# Altium PCB sadwinner.PcbDoc
Units mil, origin at the board's own origin, x right, y up, seen from the top; angles counter-clockwise.
Board outline 3706.25 x 1719.66 mil, 2 copper layers (Top Layer, Bottom Layer); 75 components, 54 nets, 287 pads, 5 vias.
Unrouted connection lines stored in the file: 158.
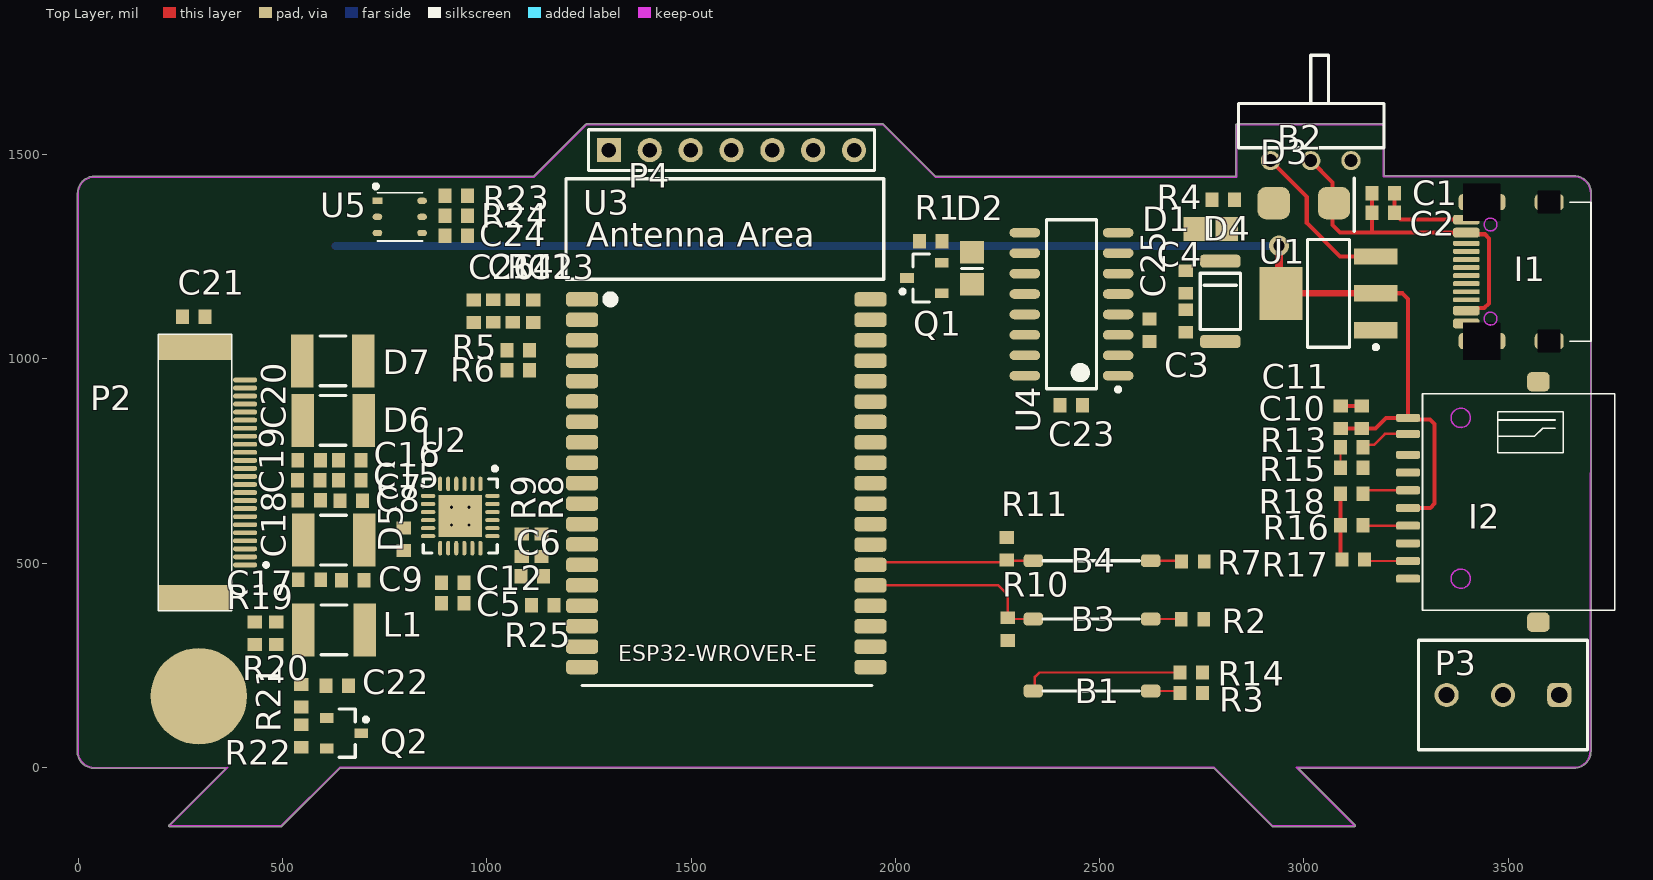
[diagram p0: Top Layer view]
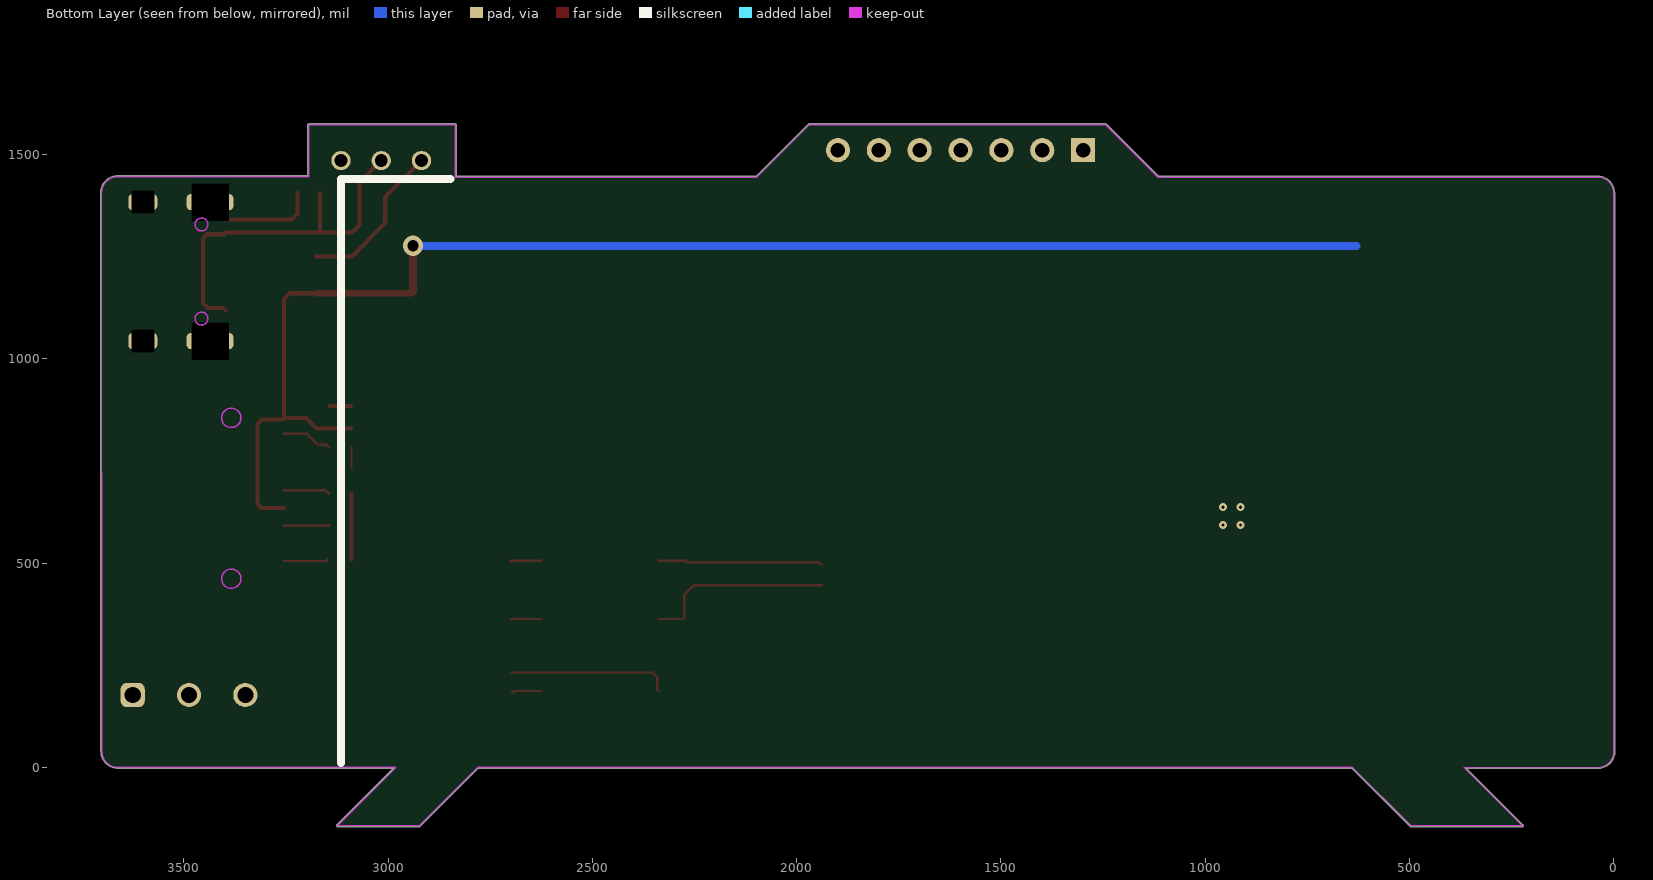
[diagram p1: Bottom Layer view, seen from below]

## Layer stack, top to bottom
Top Solder: solder mask 0.4, Solder Resist, Dk 3.5
Top Layer: signal copper 1.4
Dielectric 1: dielectric 12.6, FR-4, Dk 4.8
Bottom Layer: signal copper 1.4
Bottom Solder: solder mask 0.4, Solder Resist, Dk 3.5

## Board outline
-1.96,32.67 ccw(c39.37,39.37) 39.37,-2.5 360.84,-2.5 221.88,-141.45 ccw(c223.28,-142.86) 223.28,-144.84 496.91,-144.84 ccw(c496.91,-142.86) 498.32,-144.25 640.59,-1.98 2779.69,-1.98 2921.83,-144.12 ccw(c2923.22,-142.74) 2923.23,-144.7 3124.02,-144.7 ccw(c3124.02,-142.72) 3126,-142.72 ccw(c3124.02,-142.72) 3125.41,-141.3 2986.09,-1.98 3661.42,-1.98 ccw(c3661.42,39.37) 3702.77,39.37 3703.76,1405.51 ccw(c3661.42,1405.51) 3661.42,1447.85 3307.09,1447.85 ccw(c3306.59,1443.94) 3306.1,1447.85 3196.87,1447.85 3196.87,1571.85 ccw(c3194.88,1571.85) 3195.7,1573.66 ccw(c3193.9,1572.83) 3193.9,1574.82 2835.63,1574.82 ccw(c2835.63,1572.83) 2833.65,1572.83 2833.65,1446.87 2098.26,1446.87 1970.89,1574.24 ccw(c1969.5,1572.85) 1969.49,1574.82 1243.11,1574.82 ccw(c1243.11,1572.83) 1241.7,1574.23 1114.2,1446.73 1046.16,1446.73 ccw(c1045.6,1444.83) 1045.6,1446.81 38.14,1446.81 ccw(c39.4,1405.48) -1.94,1405.9 -1.98,40.7 ccw(c-0.51,39.37) -2.5,39.37 ccw(c39.37,39.37)

## Design rules (kind name [scope] priority, off if disabled: settings)
Clearance [All] p1: gap=3.94 ignorepadtopadclearanceinfootprint=FALSE
PolygonConnect [All] p1: connectstyle=Relief reliefconductorwidth=10 reliefentries=4 polygonreliefangle="90 Angle" airgapwidth=10
RoutingCorners [All] p1: cornerstyle=45-Degree minsetback=50 maxsetback=50
RoutingVias [All] p1: holewidth=11.81 width=11.81 viastyle="Through Hole" minholewidth=7.87 minwidth=15.75 maxholewidth=27.56 maxwidth=31.5
SolderMaskExpansion [All] p1: expansion=4 istentingtop=FALSE
Width Width_1 [All] p1: maxlimit=50 minlimit=6 preferedwidth=6
Width Width_power [InNet('3V3')] p2: maxlimit=19.68 minlimit=7.87 preferedwidth=11.81
29 further rules are at their usual default settings.

## Components (designator, comment, footprint, x,y, rotation, side; value= is the part's Value field where it differs from the comment)
B1 "button" BUTTON-BODY(3x6x2.5) 2361.22,187.01 r0 top
B2 "SWITCH" switch-3 2918.31,1485.24 r0 top
B3 "button" BUTTON-BODY(3x6x2.5) 2361.22,363.19 r0 top
B4 "button" BUTTON-BODY(3x6x2.5) 2361.22,505.91 r0 top
C1 "Cap Semi" 1608[0603] 3193.9,1405.51 r180 top value=100pF
C2 "Cap Semi" 1608[0603] 3193.9,1357.28 r180 top value=100pF
C3 "Cap Semi" 1608[0603] 2710.63,1092.52 r270 top value=100pF
C4 "Cap Semi" 1608[0603] 2710.63,1187.99 r90 top value=100pF
C5 "Cap Semi" 1608[0603] 916.34,401.57 r0 top value=100pF
C6 "Cap Semi" 1608[0603] 1111.22,467.52 r180 top value=100pF
C7 "Cap Semi" 1608[0603] 668.31,652.56 r180 top value=100pF
C8 "Cap Semi" 1608[0603] 797.24,558.07 r90 top value=100pF
C9 "Cap Semi" 1608[0603] 672.24,457.68 r180 top value=100pF
C10 "Cap Semi" 1608[0603] 3090.55,857.28 r270 top value=100pF
C11 "Cap Semi" 1608[0603] 3141.73,857.28 r270 top value=100pF
C12 "Cap Semi" 1608[0603] 916.34,451.77 r180 top value=100pF
C13 "Cap Semi" 1608[0603] 1113.19,1116.14 r270 top value=100pF
C14 "Cap Semi" 1608[0603] 1015.75,1117.13 r90 top value=100pF
C15 "Cap Semi" 1608[0603] 664.37,702.76 r180 top value=100pF
C16 "Cap Semi" 1608[0603] 664.37,751.97 r180 top value=100pF
C17 "Cap Semi" 1608[0603] 565.94,459.65 r180 top value=100pF
C18 "Cap Semi" 1608[0603] 564.96,653.54 r180 top value=100pF
C19 "Cap Semi" 1608[0603] 563.98,702.76 r180 top value=100pF
C20 "Cap Semi" 1608[0603] 564.96,751.97 r180 top value=100pF
C21 "Cap Semi" 1608[0603] 282.48,1103.35 r0 top value=100pF
C22 "Cap Semi" 1608[0603] 633.86,199.8 r0 top value=100pF
C23 "Cap Semi" 1608[0603] 2430.12,885.83 r180 top value=100pF
C24 "Cap Semi" 1608[0603] 925.2,1301.18 r0 top value=100pF
C25 "Cap Semi" 1608[0603] 2622.05,1069.88 r270 top value=100pF
C26 "Cap Semi" 1608[0603] 967.52,1116.14 r90 top value=100pF
D1 "POWER_LED" 6-0805_M 2771.65,1317.91 r180 top
D2 "POWER_LED" 6-0805_M 2187.99,1221.46 r90 top
D3 "D Schottky" TVS-BODY(4.5x3.5) 2926.18,1380.91 r0 top
D4 "D Schottky" Diode-body(5x2.45) 2795.28,1042.32 r90 top
D5 "Diode" INDC4532 625,556.1 r180 top
D6 "Diode" 1812 624.02,849.41 r0 top
D7 "Diode" 1812 623.03,995.08 r180 top
I1 "typec-16pin" Type-C-16PIN 3397.44,1086.61 r90 top
I2 "sd card" TF-Card 3254.92,855.51 r270 top
L1 "Inductor Iron" 1812 625.98,336.61 r0 top value=10mH
P2 "Header 24" Connector-FPC-0.5*24 408.46,495.57 r90 top
P3 "Header 3" Connector-3.5x3 3625,177.17 r180 top
P4 "Header 7" HDR1X7 1298.82,1510.83 r0 top
Q1 "MOSFET-N" SOT23_L 2070.87,1197.83 r180 top
Q2 "MOSFET-N" SOT23_L 650.59,83.66 r0 top
R1 "Res Semi" 1608[0603] 2086.61,1287.4 r180 top value=1K
R2 "Res Semi" 1608[0603] 2727.36,362.2 r180 top value=1K
R3 "Res Semi" 1608[0603] 2724.41,182.09 r0 top value=10K
R4 "Res Semi" 1608[0603] 2802.17,1389.76 r0 top value=1K
R5 "Res Semi" 1608[0603] 1077.36,1021.52 r0 top value=3K
R6 "Res Semi" 1608[0603] 1076.77,972.44 r180 top value=1K
R7 "Res Semi" 1608[0603] 2728.35,503.94 r0 top value=10K
R8 "Res Semi" 1608[0603] 1133.86,543.31 r90 top value=1K
R9 "Res Semi" 1608[0603] 1085.63,543.31 r90 top value=1K
R10 "Res Semi" 1608[0603] 2275.59,338.58 r90 top value=10K
R11 "Res Semi" 1608[0603] 2272.64,535.43 r270 top value=1K
R12 "Res Semi" 1608[0603] 1063.98,1117.13 r90 top value=1K
R13 "Res Semi" 1608[0603] 3117.13,783.46 r0 top value=1K
R14 "Res Semi" 1608[0603] 2724.41,232.28 r0 top value=1K
R15 "Res Semi" 1608[0603] 3117.13,733.27 r180 top value=10K
R16 "Res Semi" 1608[0603] 3117.13,592.52 r180 top value=1K
R17 "Res Semi" 1608[0603] 3121.06,508.86 r180 top value=1K
R18 "Res Semi" 1608[0603] 3117.13,670.28 r180 top value=1K
R19 "Res Semi" 1608[0603] 484.25,328.74 r90 top value=1K
R20 "Res Semi" 1608[0603] 546.26,175.2 r90 top value=1K
R21 "Res Semi" 1608[0603] 432.35,328.53 r90 top value=1K
R22 "Res Semi" 1608[0603] 545.28,76.77 r270 top value=1K
R23 "Res Semi" 1608[0603] 925.2,1399.61 r0 top value=1K
R24 "Res Semi" 1608[0603] 925.2,1350.39 r0 top value=1K
R25 "Res Semi" 1608[0603] 1136.81,396.65 r180 top value=1K
U1 "AMS1117" SOT223_M 3060.04,1160.43 r180 top
U2 "MPU6050" MPU6050 935.04,615.16 r270 top
U3 "ESP32-WROVER-E" ESP32-WROVER-E 1233.39,1145.63 r0 top
U4 "CH340" SOP16-SOP127P650X265-16N 2431.1,1133.66 r180 top
U5 "SHT20" SHT20 787.4,1347.44 r0 top

## Footprints (in the part's own frame and the unit in brackets; to place one, negate y for a bottom-side part, rotate by r counter-clockwise, add the part's x,y. Pads: shape width x height; smd on the part's side, far side on the other; paste and mask are expansions set on the pad)
6-0805_M [mm] "Chip Resistor, Body 2.0x1.2mm, IPC Low Density"
  rect 1.4x1.5 smd: 1(-1,0) 2(1,0)
  silkscreen extent 0,-0.65 0,0.65, body extent -1.07,-0.7 1.07,0.7, height 0.7
1608[0603] [mm] "Chip Capacitor, Body 1.6x0.8mm, IPC High Density"
  rect 0.8x0.9 smd: 1(-0.7,0) 2(0.7,0)
  body extent -0.87,-0.48 0.87,0.48, height 1.3
1812 [mm] "Chip Capacitor, Body 4.5x3.2mm, IPC High Density"
  rect 1.4x3.3 smd: 1(-1.9,0) 2(1.9,0)
  silkscreen extent -0.8,-1.55 0.8,1.55, body extent -2.4,-1.7 2.4,1.7, height 1.4
BUTTON-BODY(3x6x2.5) [mm]
  rrect50% 1.2x0.8 smd: 1(-0.6,0) 2(6.7,0)
  silkscreen extent 0,0 6,0
Connector-3.5x3 [mm]
  rrect50% 1.5x1.5 hole 1: 1(0,0)
  round 1.5 hole 1: 2(3.5,0) 3(7,0)
  silkscreen extent -1.75,-3.4 8.75,3.4
Connector-FPC-0.5*24 [mm]
  oval 0.3x1.5 smd: 1(0,0) 2(0.5,0) 3(1,0) 4(1.5,0) 5(2,0) 6(2.5,0) 7(3,0) 8(3.5,0) 9(4,0) 10(4.5,0) 11(5,0) 12(5.5,0) 13(6,0) 14(6.5,0) 15(7,0) 16(7.5,0) 17(8,0) 18(8.5,0) 19(9,0) 20(9.5,0) 21(10,0) 22(10.5,0) 23(11,0) 24(11.5,0)
  rect 1.6x4.575 smd: 25(-2.05,3.112) 26(13.55,3.112)
  silkscreen extent -2.85,-1.41 14.35,5.4
Diode-body(5x2.45) [mm]
  rrect50% 0.8x2.5 smd: 1(0,0) 2(5,0)
  silkscreen extent 0.75,-1.25 4.25,1.25
ESP32-WROVER-E [mm]
  rrect50% 2x0.9 smd: 1(0,0) 2(0,-1.27) 3(0,-2.54) 4(0,-3.81) 5(0,-5.08) 6(0,-6.35) 7(0,-7.62) 8(0,-8.89) 9(0,-10.16) 10(0,-11.43) 11(0,-12.7) 12(0,-13.97) 13(0,-15.24) 14(0,-16.51) 15(0,-17.78) 16(0,-19.05) 17(0,-20.32) 18(0,-21.59) 19(0,-22.86) 20(17.922,-22.864) 21(17.922,-21.594) 22(17.922,-20.324) 23(17.922,-19.054) 24(17.922,-17.784) 25(17.922,-16.514) 26(17.922,-15.244) 27(17.922,-13.974) 28(17.922,-12.704) 29(17.922,-11.434) 30(17.922,-10.164) 31(17.922,-8.894) 32(17.922,-7.624) 33(17.922,-6.354) 34(17.922,-5.084) 35(17.922,-3.814) 36(17.922,-2.544) 37(17.922,-1.274) 38(17.922,-0.004)
  silkscreen extent -1,-24 18.75,7.5
HDR1X7 [mm] "Connector; Header; 7 Position"
  rect 1.5x1.5 hole 0.9: 1(0,0)
  round 1.5 hole 0.9: 2(2.54,0) 3(5.08,0) 4(7.62,0) 5(10.16,0) 6(12.7,0) 7(15.24,0)
  silkscreen extent -1.27,-1.27 16.51,1.27
INDC4532 [mm] "Chip Inductor, Body 4.5x3.2mm, IPC High Density"
  rect 1.4x3.3 smd: 1(-1.9,0) 2(1.9,0)
  silkscreen extent -0.8,-1.55 0.8,1.55, body extent -2.4,-1.7 2.4,1.7, height 0.55
MPU6050 [mm]
  oval 0.9x0.25 smd: 1(-2,1.25) 2(-2,0.75) 3(-2,0.25) 4(-2,-0.25) 5(-2,-0.75) 6(-2,-1.25) 13(2,-1.25) 14(2,-0.75) 15(2,-0.25) 16(2,0.25) 17(2,0.75) 18(2,1.25)
  oval 0.25x0.9 smd: 7(-1.25,-2) 8(-0.75,-2) 9(-0.25,-2) 10(0.25,-2) 11(0.75,-2) 12(1.25,-2) 19(1.25,2) 20(0.75,2) 21(0.25,2) 22(-0.25,2) 23(-0.75,2) 24(-1.25,2)
  rect 2.6x2.7 smd: 25(0,0)
  silkscreen extent -3.07,-2.3 2.3,2.3, body extent -2.15,-2.15 2.15,2.15, height 0.9
SHT20 [mm]
  rect 0.6x0.4 smd: 1(-1.4,1)
  oval 0.6x0.4 smd: 2(-1.4,0) 3(-1.4,-1) 4(1.375,-1) 5(1.375,0) 6(1.375,1)
  silkscreen extent -1.62,-1.5 1.4,2.02
SOP16-SOP127P650X265-16N [mm] "SOP, 16-Leads, Body 10.30x3.90mm, Pitch 1.27mm, IPC Medium Density"
  oval 1.9x0.6 smd: 1(-2.9,4.445) 2(-2.9,3.175) 3(-2.9,1.905) 4(-2.9,0.635) 5(-2.9,-0.635) 6(-2.9,-1.905) 7(-2.9,-3.175) 8(-2.9,-4.445) 9(2.9,-4.445) 10(2.9,-3.175) 11(2.9,-1.905) 12(2.9,-0.635) 13(2.9,0.635) 14(2.9,1.905) 15(2.9,3.175) 16(2.9,4.445)
  silkscreen extent -3.03,-5.25 1.55,5.42, body extent -1.95,-5.25 1.95,5.25, height 2.65
SOT23_L [mm] "SOT23, 3-Leads, Body 2.9x1.3mm, Pitch 0.95mm, Lead Span 2.3mm - Reverse Pinning, IPC High Density"
  rect 0.85x0.6 smd: 1(1.075,0) 2(-1.075,-0.95) 3(-1.075,0.95)
  silkscreen extent -0.3,-1.5 1.47,1.5, body extent -0.7,-1.5 0.7,1.5, height 1.1
SOT223_M [mm] "SOT223, 4-Leads, Body 6.5x3.5mm, Pitch 2.3mm, Lead Span 7mm, IPC Low Density"
  rect 2.7x1 smd: 1(-2.95,2.3) 2(-2.95,0) 3(-2.95,-2.3)
  rect 2.7x3.3 smd: 4(2.95,0)
  silkscreen extent -3.08,-3.35 1.3,3.47, body extent -1.85,-3.35 1.85,3.35, height 1.7
switch-3 [mm]
  round 1.2 hole 0.8: 1(0,0) 2(2.5,0) 3(5,0)
  silkscreen extent -2,0.8 7.05,6.55
TF-Card [mm] "pin1 pin2 is check pin"
  rrect50% 0.5x1.5 smd: 1(0,0) 2(1,0) 3(2.3,0) 4(3.4,0) 5(4.5,0) 6(5.6,0) 7(6.7,0) 8(7.8,0) 9(8.9,0) 10(10,0)
  rrect50% 1.2x1.4 smd: 11(12.705,8.1) 12(-2.245,8.1)
  Keep-Out Layer circle w0.1: c10,3.275 r0.6
  Keep-Out Layer circle w0.1: c0,3.275 r0.6
  silkscreen extent -1.5,0.9 11.95,12.85
TVS-BODY(4.5x3.5) [mm]
  rrect50% 2x2 smd: 1(0,0) 2(3.75,0)
  silkscreen extent 5,-1.75 5,1.55
Type-C-16PIN [mm]
  rrect50% 0.6x1.65 smd: 1(0,0) 2(0.8,0) 11(5.65,0) 12(6.45,0)
  rrect50% 0.3x1.65 smd: 3(1.475,-0.005) 4(1.975,-0.005) 5(2.475,-0.005) 6(2.975,-0.005) 7(3.475,-0.005) 8(3.975,-0.005) 9(4.475,-0.005) 10(4.975,-0.005)
  rrect50% 1x2.9 hole 2.3 square: 13(-1.1,-0.975) 14(7.54,-0.975)
  rrect50% 1x1.8 hole 1.4 square: 15(-1.1,-5.155) 16(7.54,-5.155)
  Keep-Out Layer circle w0.1: c6.15,-1.505 r0.4
  Keep-Out Layer circle w0.1: c0.3,-1.505 r0.4
  silkscreen extent -1.1,-7.76 7.54,-6.43

## Part data
B1 B3 B4: library part button-switch-2
B2: library part button-switch-3
C1 C2 C3 C4 C5 C6 C7 C8 C9 C10 C11 C12 C13 C14 C15 C16 C17 C18 C19 C20 C21 C22 C23 C24 C25 C26: "Capacitor (Semiconductor SIM Model)", LatestRevisionDate=29-May-2009, LatestRevisionNote="IPC-7351 Footprint Added.", PackageDescription="Chip Capacitor", PackageReference=C1206, Published=8-Jun-2000, Publisher="Altium Limited"
D1 D2: library part LED3, "Typical BLUE SiC LED", DatasheetVersion=16-Apr-2002, LatestRevisionDate=17-Dec-2003, LatestRevisionNote="PCB Footprint replaced.", PackageDescription="SM LED; 2 C-Bend Leads; Body 3.5 x 2.8 x 1.9 mm, inc leads (LxWxH typ)", PackageReference=3.5X2.8X1.9, PackageVersion=16-Apr-2002, Published=8-Jun-2000, Publisher="Altium Limited"
D3 D4: "Schottky Diode", Code_JEDEC=DO-214-AA, LatestRevisionDate=17-Jul-2002, LatestRevisionNote="Re-released for DXP Platform.", PackageDescription="DO-214-AA/SMB; 2 C-Bend Leads; Body 5.3 x 3.6 mm, inc. leads (LxW)", PackageReference=SMB, Published=8-Jun-2000, Publisher="Altium Limited"
D5 D6 D7: "Default Diode", Code_JEDEC=DO-214-AB, LatestRevisionDate=17-Jul-2002, LatestRevisionNote="Re-released for DXP Platform.", PackageDescription="DO-214-AB/SMC; 2 C-Bend Leads; Body 7.9 x 5.9 mm, inc. leads (LxW)", PackageReference=SMC, PackageVersion=Sep-1996, Published=8-Jun-2000, Publisher="Altium Limited"
I2: library part "sd card-10pin", "sd card-10pin"
L1: "Magnetic-Core Inductor", LatestRevisionDate=17-Jul-2002, LatestRevisionNote="Re-released for DXP Platform.", PackageDescription="Axial Device, Thru-Hole; 2 Leads; 0.9 in Pin Spacing", PackageReference=AXIAL-0.9, Published=24-Mar-1999, Publisher="Altium Limited"
P2: "Header, 24-Pin", LatestRevisionDate=17-Jul-2002, LatestRevisionNote="Re-released for DXP Platform.", Publisher="Altium Limited"
P3: "Header, 3-Pin", LatestRevisionDate=17-Jul-2002, LatestRevisionNote="Re-released for DXP Platform.", Publisher="Altium Limited"
P4: "Header, 7-Pin", LatestRevisionDate=17-Jul-2002, LatestRevisionNote="Re-released for DXP Platform.", Publisher="Altium Limited"
Q1 Q2: "N-Channel MOSFET", LatestRevisionDate=17-Jul-2002, LatestRevisionNote="Re-released for DXP Platform.", PackageDescription="TO, Flat Index; 3 In-Line, Axial Leads; Body Dia. 4.6mm; Lead Dia. 0.5 mm (max)", PackageReference=E3, PackageVersion=1995/1996, Published=8-Jun-2000, Publisher="Altium Limited"
R1 R2 R3 R4 R5 R6 R7 R8 R9 R10 R11 R12 R13 R14 R15 R16 R17 R18 R19 R20 R21 R22 R23 R24 R25: "Semiconductor Resistor", LatestRevisionDate=17-Jul-2002, LatestRevisionNote="Re-released for DXP Platform.", PackageDescription="Axial Device, Thru-Hole; 2 Leads; 0.5 in Pin Spacing", PackageReference=AXIAL-0.5, Published=8-Jun-2000, Publisher="Altium Limited"
U4: library part CH340C
U5: "sensor for the temperature and humidity"

## Free pads (board coordinates)
  round 236.22 smd: 1(295.28,174.21)

## Via types
v1: diameter 19.68, hole 7.87, Top Layer to Bottom Layer, 4 vias
v2: diameter 50, hole 28, Top Layer to Bottom Layer, 1 vias

## Nets (pads, with @x,y where several pads share a name; then routed paths per layer and width w, separated by ;. In a path a pad name is that pad's centre, name@x,y a point inside that pad or via, vN(x,y) a via of type N, cw(c..) or ccw(c..) an arc to the next point about the centre after c; other vN are vias at no path point)
3V3: C3.2 C4.2 C5.1 C10.2 C11.2 C12.2 C14.2 C24.2 C26.2 D1.1 D4.2 I2.1 I2.6 L1.1 P2.15 P2.16 P4.2 R1.1 R2.1 R8.1 R9.1 R11.1 R12.2 R14.2 R16.2 R17.2 R18.2 R19.1 R23.2 R24.2 U1.2 U1.4 U2.8 U2.13 U3.2 U5.5 | length 3707
  Top Layer w10: U1.4@2938.98,1165.35 U1.4 ; R17.2@3089.57,508.86 R16.2 R18.2 ; C10.2 C11.2 3175.2,829.72 3200.98,855.51 I2.1 ; U1.2 3241.14,1160.43 3254.92,1146.65 I2.1 ; I2.6 3309.25,635.04 3319.88,645.67 3319.88,840.55 3309.06,851.38 3259.06,851.38 I2.1
  Top Layer w15.75: U1.4 U1.2
  Top Layer w19.68: U1.4@2938.98,1165.35 v2(2938.98,1276.57)
  Bottom Layer w19.68: 629.92,1276.57 v2(2938.98,1276.57)
BOOT0: B4.1 R11.2 U3.25 | length 404.6
  Top Layer w6: U3.25 1945.47,501.97 2266.73,501.97 R11.2 2274.61,505.91 B4.1
BOOT1: B3.1 R10.2 U3.24 | length 465.6
  Top Layer w6: U3.24 2252.36,445.47 2275.59,422.24 R10.2 2278.54,363.19 B3.1
BS: P2.8 R19.2 R21.2
BUSY: P2.9 U3.8
DN: I1.5 I1.7 U4.6
DP: I1.6 I1.8 U4.5
GDR: P2.2 Q2.2 R22.2
GND: C1.1 C2.1 C3.1 C4.1 C5.2 C6.1 C7.1 C8.1 C9.1 C10.1 C11.1 C12.1 C13.1 C14.1 C15.1 C16.1 C17.1 C18.1 C19.1 C20.1 C21.1 C23.1 C24.1 C25.2 C26.1 D2.2 D3.1 D4.1 D7.2 I1.1 I1.12 I1.13 I1.14 I1.15 I1.16 I2.8 I2.11 I2.12 P2.17 P3.1 P4.1 R3.2 R4.2 R6.2 R7.2 R10.1 R15.1 R20.1 R21.1 R22.1 U1.1 U2.1 U2.9 U2.11 U2.18 U2.25 U3.1 U3.5 U3.15 U3.38 U4.1 U5.2 | length 283.5
  Top Layer w10: C10.1 C11.1 ; C1.1 3221.46,1355.32 3236.22,1340.55 I1.12
  other v1: 913.39,593.5 956.69,593.5 913.39,636.81 956.69,636.81
I2C_SCL: R9.2 R23.1 U2.23 U3.12 U5.6
I2C_SDA: R8.2 R24.1 U2.24 U3.11 U5.1
MPU_INT: U2.12 U3.13
MTDO: B1.1 R14.1 U3.23 | length 395.9
  Top Layer w6: B1.1 2341.54,190.94 2341.54,221.46 2352.36,232.28 R14.1
NetB1_2: B1.2 R3.1 | length 73.9
  Top Layer w6: B1.2 2691.93,187.01 R3.1
NetB2_1: B2.1 U1.3 | length 392.4
  Top Layer w10: B2.1 3007.01,1396.54 3007.01,1332.56 3088.58,1250.98 U1.3
NetB3_2: B3.2 R2.2 | length 75.2
  Top Layer w6: B3.2 2698.82,363.19 R2.2
NetB4_2: B4.2 R7.1 | length 76.6
  Top Layer w6: B4.2 2698.82,505.91 R7.1
NetC6_2: C6.2 U2.20
NetC7_2: C7.2 P2.4
NetC8_2: C8.2 U2.10
NetC9_2: C9.2 P2.5
NetC15_2: C15.2 P2.18
NetC16_2: C16.2 P2.19
NetC17_2: C17.2 P2.20
NetC19_2: C19.2 P2.22
NetC21_2: C21.2 P2.24
NetC22_1: C22.1 D6.2 D7.1
NetC22_2: C22.2 D5.1 L1.2 Q2.1
NetC25_1: C25.1 U4.4
NetD1_2: D1.2 R4.1
NetD2_1: D2.1 Q1.3
NetI2_2: I2.2 R13.2 | length 123.8
  Top Layer w6: R13.2 3150.59,789.37 3171.26,789.37 3198.03,816.14 I2.2
NetP1_1: pad.1 R25.2
NetQ1_1: Q1.1 R1.2
OLED_DC: P2.11 P4.6 U3.10
PREVGH: C18.2 D5.2 P2.21
PREVGL: C20.2 D6.1 P2.23
PWM: Q1.2 U3.37
RES: P2.3 Q2.3 R20.2
REST: C13.2 P2.10 P4.5 R12.1 U3.3
RXD0: U3.34 U4.2
S_P: R5.2 R6.1 U3.4
SD_CKECK: R13.1 R15.2 U3.9 | length 50.2
  Top Layer w6: R15.2 R13.1
TOUCH: R25.1 U3.16
TXD0: U3.35 U4.3
UART_RX: P3.2 U3.6
UART_TX: P3.3 U3.7
V-TC: B2.2 C1.2 C2.2 C23.2 D3.2 I1.2 I1.11 R5.1 U4.16 | length 895.1
  Top Layer w10: B2.2 3069.88,1432.09 3069.88,1327.76 3088.58,1309.06 3165.35,1309.06 ; C1.2 C2.2 3166.34,1310.04 3165.35,1309.06 ; I1.11@3397.09,1309.41 I1.11 ; I1.2 3403.69,1124.36 3441.29,1124.36 3452.76,1135.83 3452.76,1294.98 3442.77,1304.97 3401.52,1304.97 I1.11 ; 3165.35,1309.06 I1.11
VSPI_CLK: I2.7 P2.13 P4.3 R16.1 U3.30 | length 110.6
  Top Layer w6: R16.1 3145.47,591.73 I2.7
VSPI_CS0: P4.7 U3.29
VSPI_CS1: P2.12 U3.26
VSPI_CS2: I2.4 U3.36
VSPI_MISO: I2.9 R17.1 U3.31 | length 107.8
  Top Layer w6: R17.1 3152.36,505.12 I2.9
VSPI_MOSI: I2.5 P2.14 P4.4 R18.1 U3.33 | length 113.6
  Top Layer w6: R18.1 3152.76,678.35 I2.5
pads on no net: B2.3 I1.3 I1.4 I1.9 I1.10 I2.3 I2.10 P2.1 P2.6 P2.7 P2.25 P2.26 U2.2 U2.3 U2.4 U2.5 U2.6 U2.7 U2.14 U2.15 U2.16 U2.17 U2.19 U2.21 U2.22 U3.14 U3.17 U3.18 U3.19 U3.20 U3.21 U3.22 U3.27 U3.28 U3.32 U4.7 U4.8 U4.9 U4.10 U4.11 U4.12 U4.13 U4.14 U4.15 U5.3 U5.4

## Keep-outs
Keep-Out Layer:
  lines w3.94: -0.51,39.37 ccw(c39.37,39.37) 39.37,-0.51 365.63,-0.51 ; 0,32.99 0,1405.51 ; 0.08,1403.6 cw(c39.37,1405.51) 38.14,1444.83 1045.6,1444.83 ; 366.14,0 223.28,-142.86 496.91,-142.86 639.76,0 2780.51,0 2923.23,-142.72 3124.02,-142.72 2981.3,0 3307.09,0 3661.42,0 ccw(c3661.42,39.37) 3700.79,39.37 3701.77,1405.51 ccw(c3661.42,1405.51) 3661.42,1445.87 3307.09,1445.87 ; 1045.68,1444.75 1115.02,1444.75 1243.11,1572.83 1969.49,1572.83 2097.44,1444.88 2835.63,1444.88 2835.63,1572.83 3193.9,1572.83 ; 3194.88,1571.85 3194.88,1445.87 3306.1,1445.87

## Silkscreen, mask and mechanical layers (free items; w line width, h text height)
Bottom Overlay:
  lines w19.68: 2847.44,1439.96 3115.16,1439.96 3115.16,1437.99 3115.16,10.83

## Text inside footprints (layer, text, board x,y; h text height)
U3: Top Overlay "Antenna Area" at 1243.39,1273.74 h60